# Altium PCB LevelShifter_PCB.PcbDoc
Units mm, origin at the board's own origin, x right, y up, seen from the top; angles counter-clockwise.
Board outline 24.38 x 18.06 mm, 2 copper layers (Top Layer, Bottom Layer); 10 components, 8 nets, 26 pads, 0 vias.
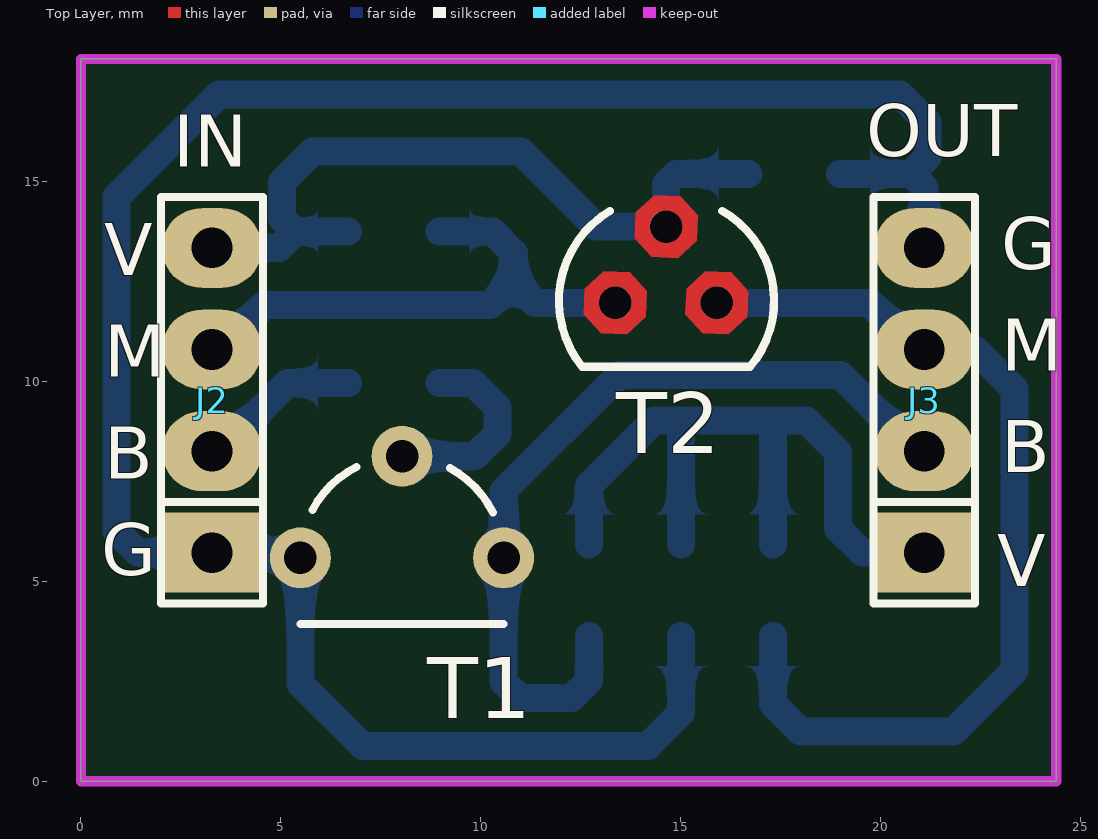
[diagram p0: Top Layer view]
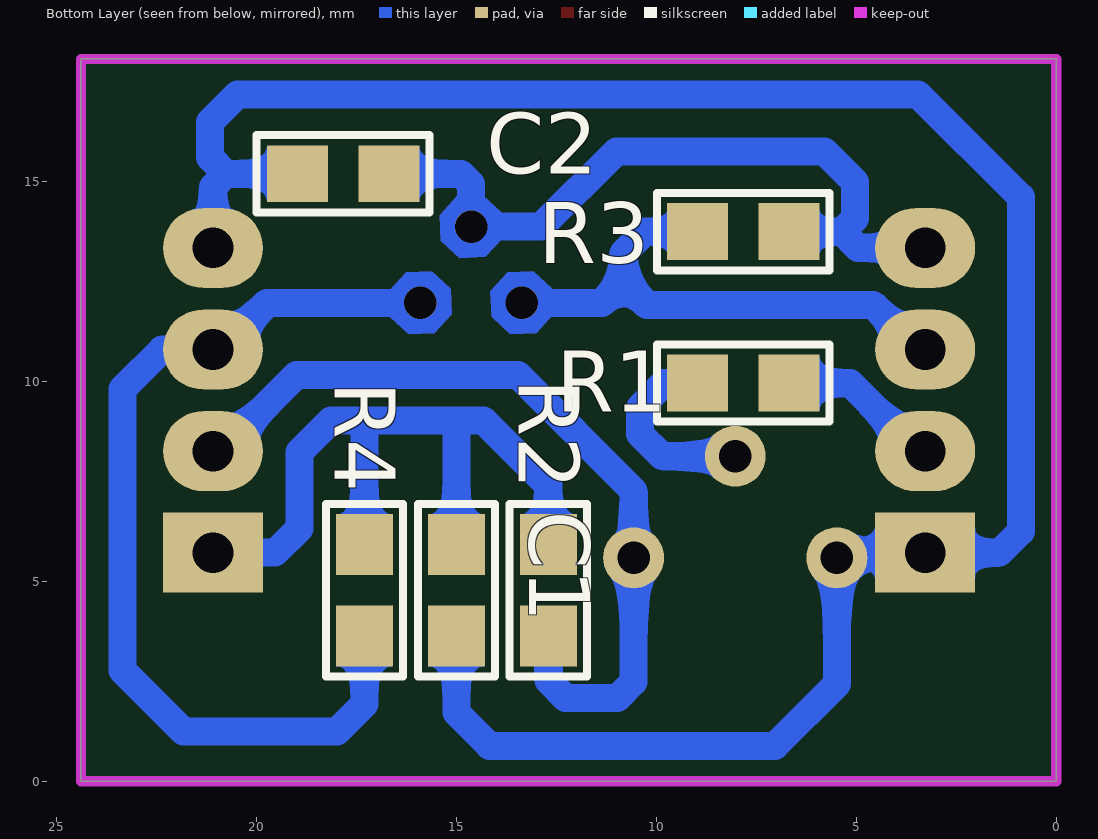
[diagram p1: Bottom Layer view, seen from below]
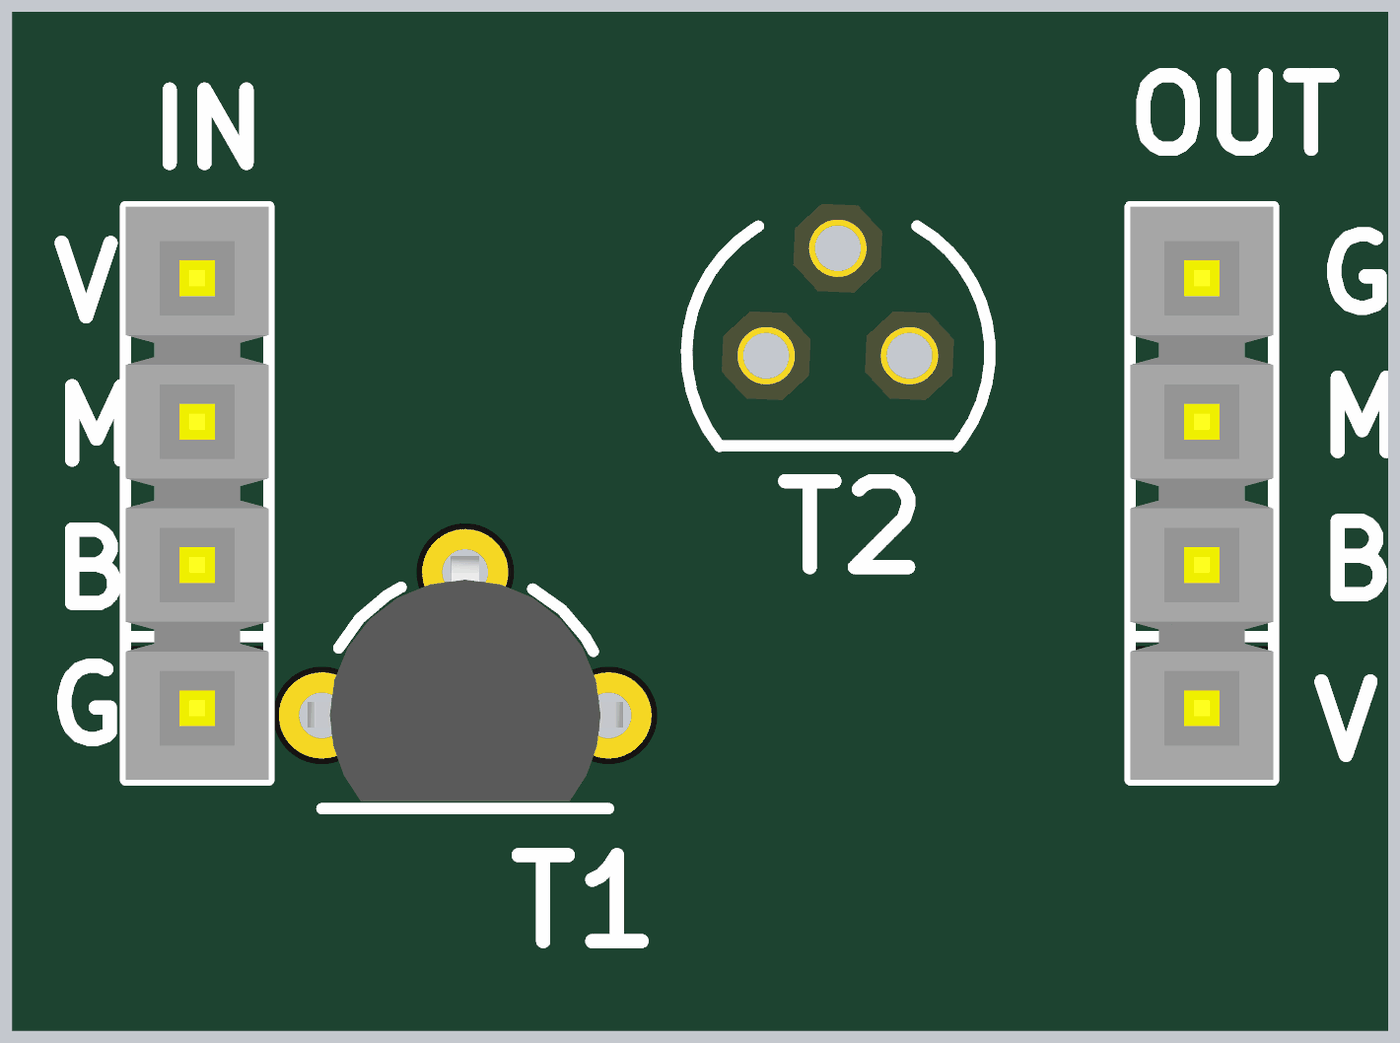
[diagram p2: 3D render of the assembled board from above, using the file's embedded part models]
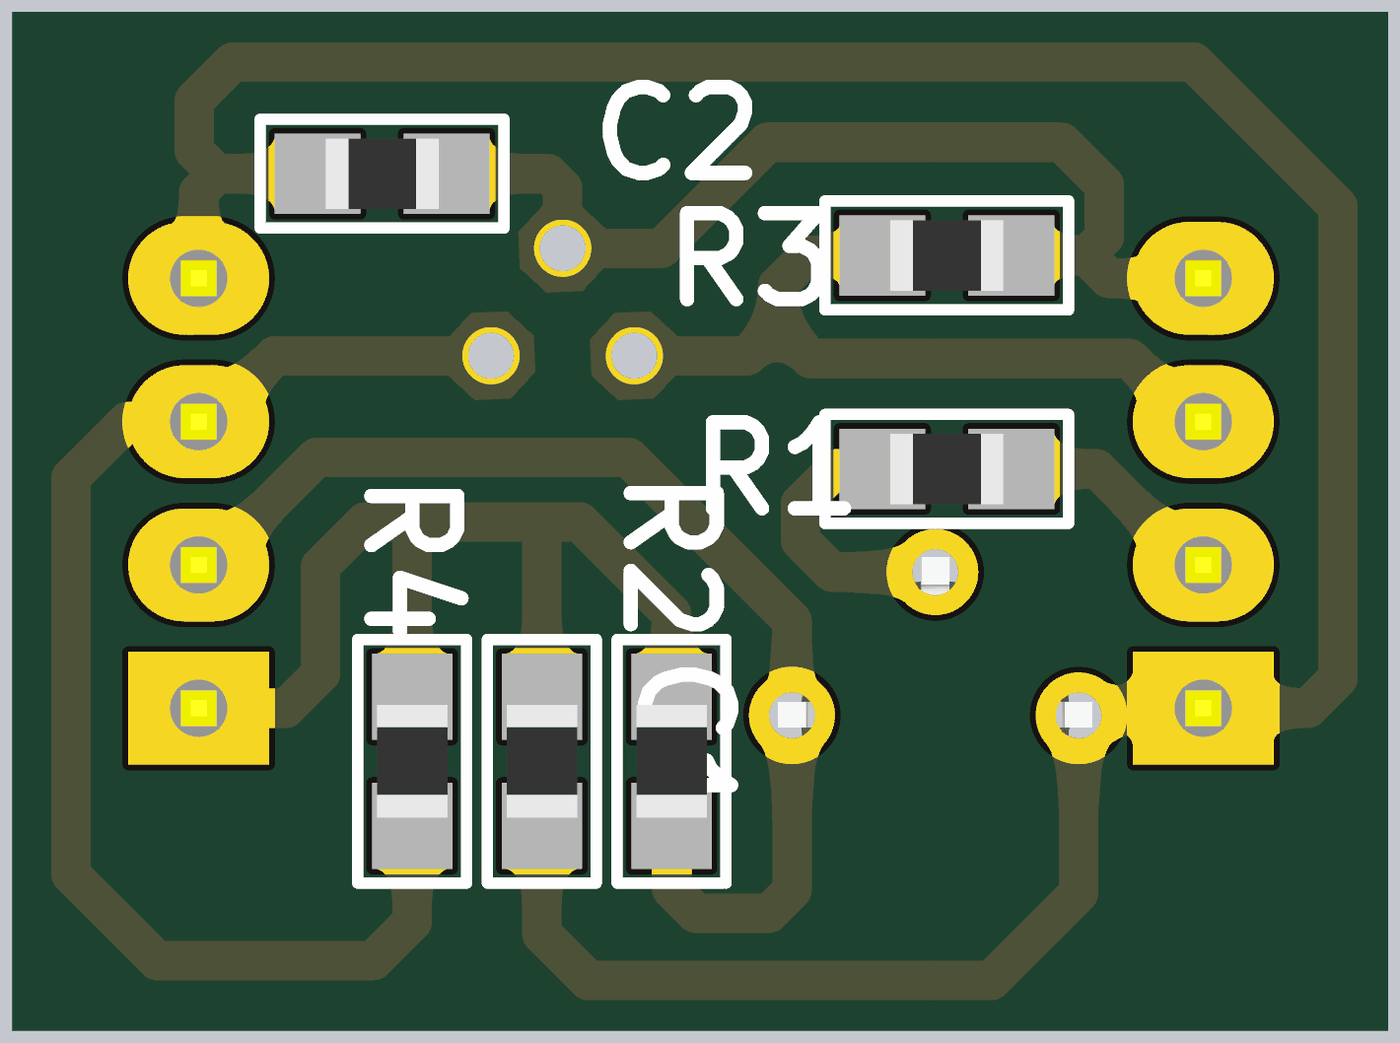
[diagram p3: 3D render of the assembled board from below, using the file's embedded part models]

## Layer stack, top to bottom
Top Solder: solder mask 0.0102, Solder Resist, Dk 3.5
Top Layer: signal copper 0.0356
Dielectric 1: dielectric 0.32, FR-4, Dk 4.8
Bottom Layer: signal copper 0.0356
Bottom Solder: solder mask 0.0102, Solder Resist, Dk 3.5

## Board outline
0,0 24.384,0 24.384,18.059 0,18.059

## Design rules (kind name [scope] priority, off if disabled: settings)
Clearance [All] p1: gap=0.4
PolygonConnect [All] p1: connectstyle=Relief reliefconductorwidth=0.254 reliefentries=4 polygonreliefangle="90 Angle" airgapwidth=0.254
RoutingVias [All] p1: holewidth=0.711 width=1.27 viastyle="Through Hole" minholewidth=0.711 minwidth=1.27 maxholewidth=0.711 maxwidth=1.27
SolderMaskExpansion [All] p1: expansion=0.102
Width [All] p1: maxlimit=0.7 minlimit=0.5 preferedwidth=0.6
30 further rules are at their usual default settings.

## Components (designator, comment, footprint, x,y, rotation, side; value= is the part's Value field where it differs from the comment)
C1 "100nF" 0805 14.999,4.775 r270 bottom
C2 "100nF" 0805 17.831,15.189 r0 bottom
J2 "IN" SIP4 3.277,9.525 r90 top
J3 "OUT" SIP4 21.082,9.525 r90 top
R1 "2k2" 0805 7.823,9.957 r0 bottom
R2 "220k" 0805 12.7,4.775 r270 bottom
R3 "2k2" 0805 7.823,13.741 r0 bottom
R4 "2k2" 0805 17.297,4.775 r270 bottom
T1 "BC557" TO92 8.026,6.858 r180 top
T2 "2N7000" *TO-92 14.63,11.963 r0 top

## Footprints (in the part's own frame and the unit in brackets; to place one, negate y for a bottom-side part, rotate by r counter-clockwise, add the part's x,y. Pads: shape width x height; smd on the part's side, far side on the other; paste and mask are expansions set on the pad)
0805 [mil] "Pasivo 0805"
  rect 60x56 smd: 1(-45,0) 2(45,0)
  silkscreen extent -85,-38 85,38, body extent -39,-25 39,25, height 15
*TO-92 [mil]
  round 32 hole 32: 1(-50,0) 2(0,75) 3(50,0)
  Top Layer region: 81.01,11.29 63.95,29.91 38.71,31.01 20.09,13.95 18.99,-11.29 36.05,-29.91 61.29,-31.01 79.91,-13.95
  Top Layer region: 31.01,86.29 13.95,104.91 -11.29,106.01 -29.91,88.95 -31.01,63.71 -13.95,45.09 11.29,43.99 29.91,61.05
  Top Layer region: -18.99,11.29 -36.05,29.91 -61.29,31.01 -79.91,13.95 -81.01,-11.29 -63.95,-29.91 -38.71,-31.01 -20.09,-13.95
  Bottom Layer region: 81.01,11.29 63.95,29.91 38.71,31.01 20.09,13.95 18.99,-11.29 36.05,-29.91 61.29,-31.01 79.91,-13.95
  Bottom Layer region: 31.01,86.29 13.95,104.91 -11.29,106.01 -29.91,88.95 -31.01,63.71 -13.95,45.09 11.29,43.99 29.91,61.05
  Bottom Layer region: -18.99,11.29 -36.05,29.91 -61.29,31.01 -79.91,13.95 -81.01,-11.29 -63.95,-29.91 -38.71,-31.01 -20.09,-13.95
  Multi-Layer region: 81.01,11.29 63.95,29.91 38.71,31.01 20.09,13.95 18.99,-11.29 36.05,-29.91 61.29,-31.01 79.91,-13.95
  Multi-Layer region: 31.01,86.29 13.95,104.91 -11.29,106.01 -29.91,88.95 -31.01,63.71 -13.95,45.09 11.29,43.99 29.91,61.05
  Multi-Layer region: -18.99,11.29 -36.05,29.91 -61.29,31.01 -79.91,13.95 -81.01,-11.29 -63.95,-29.91 -38.71,-31.01 -20.09,-13.95
  silkscreen extent -105,-63 106,90
SIP4 [mm]
  rect 2x2.5 hole 1.016: 1(-3.81,0)
  oval 2x2.5 hole 1.016: 2(-1.27,0) 3(1.27,0) 4(3.81,0)
  silkscreen extent -5.08,-1.27 5.08,1.27, body extent -5.08,-1.27 5.08,1.27, height 8.38
TO92 [mil]
  round 60 hole 32: 1(0,-50) 2(100,50) 3(-100,50)
  silkscreen extent -100,-39 100,115, body extent -110,-61 110,110, height 315

## Part data
C1 C2: library part CAP
J2 J3: library part CON4
R1 R2 R3 R4: library part RES
T1: library part "TRANSISTOR PNP"
T2: "MOSFETs- Power and Small Signal 60V 200mA N-Channel No-Cancel/No-Return"

## Nets (pads, with @x,y where several pads share a name; then routed paths per layer and width w, separated by ;. In a path a pad name is that pad's centre, name@x,y a point inside that pad or via, vN(x,y) a via of type N, cw(c..) or ccw(c..) an arc to the next point about the centre after c; other vN are vias at no path point)
GND: C1.2 C2.2 J2.1 J3.4 T1.2 | length 55.6
  Bottom Layer w0.7: C1.2 14.999,1.714 14.173,0.889 7.036,0.889 5.486,2.438 T1.2 5.359,5.715 J2.1 1.422,5.715 0.889,6.248 0.889,14.605 3.454,17.17 20.472,17.17 21.158,16.485 21.158,15.596 20.752,15.189 ; C2.2 20.752,15.189 ; J3.4 21.082,14.859 20.752,15.189
NetR1_2: R1.2 T1.1 | length 5
  Bottom Layer w0.7: T1.1 9.855,8.128 10.414,8.687 10.414,9.347 9.804,9.957 R1.2
NMOS_IN: J2.3 R3.2 T2.1 | length 13.8
  Bottom Layer w0.7: J2.3 3.461,10.795 4.579,11.913 10.236,11.913 10.82,12.497 ; R3.2 10.287,13.741 10.82,13.208 10.82,12.497 ; T2.1 11.354,11.963 10.82,12.497
NMOS_OUT: J3.3 R4.2 T2.3 | length 24
  Bottom Layer w0.7: T2.3 19.729,11.963 20.897,10.795 J3.3 22.352,10.795 23.343,9.804 23.343,2.769 21.819,1.245 17.983,1.245 17.297,1.93 R4.2
PNP_IN: J2.2 R1.1 | length 4.1
  Bottom Layer w0.7: J2.2 3.461,8.255 5.163,9.957 R1.1
PNP_OUT: J3.2 R2.2 T1.3 | length 20.9
  Bottom Layer w0.7: R2.2 12.7,2.515 12.268,2.083 10.973,2.083 10.566,2.489 T1.3 10.566,7.264 13.462,10.16 18.992,10.16 20.897,8.255 J3.2
VCC_IN: C2.1 J2.4 R3.1 T2.2 | length 18.9
  Bottom Layer w0.7: J2.4 4.953,13.335 5.359,13.741 ; R3.1 5.359,13.741 ; C2.1 14.884,15.189 14.63,14.935 T2.2 12.878,13.868 10.998,15.748 5.791,15.748 5.029,14.986 5.029,14.072 5.359,13.741
VCC_OUT: C1.1 J3.1 R2.1 R4.1 | length 19.4
  Bottom Layer w0.7: R2.1 12.7,7.391 14.326,9.017 15.164,9.017 ; C1.1 14.999,8.852 15.164,9.017 ; R4.1 17.297,8.839 17.12,9.017 ; J3.1 19.533,5.715 18.923,6.325 18.923,8.23 18.136,9.017 17.12,9.017 ; 15.164,9.017 17.12,9.017

## Keep-outs
Keep-Out Layer:
  the board outline again, w0.254

## Silkscreen, mask and mechanical layers (free items; w line width, h text height)
Top Overlay:
  text "OUT" at 19.634,15.621 h1.3
  text "IN" at 2.311,15.367 h1.3
  text "G" at 23.012,12.802 h1.3
  text "V" at 0.584,12.649 h1.3
  text "M" at 23.012,10.262 h1.3
  text "M" at 0.584,10.109 h1.3
  text "B" at 23.012,7.722 h1.3
  text "B" at 0.584,7.569 h1.3
  text "G" at 0.508,5.156 h1.3
  text "V" at 22.911,4.877 h1.3